# EAGLE board schematic (EAGLE 8.3.1)
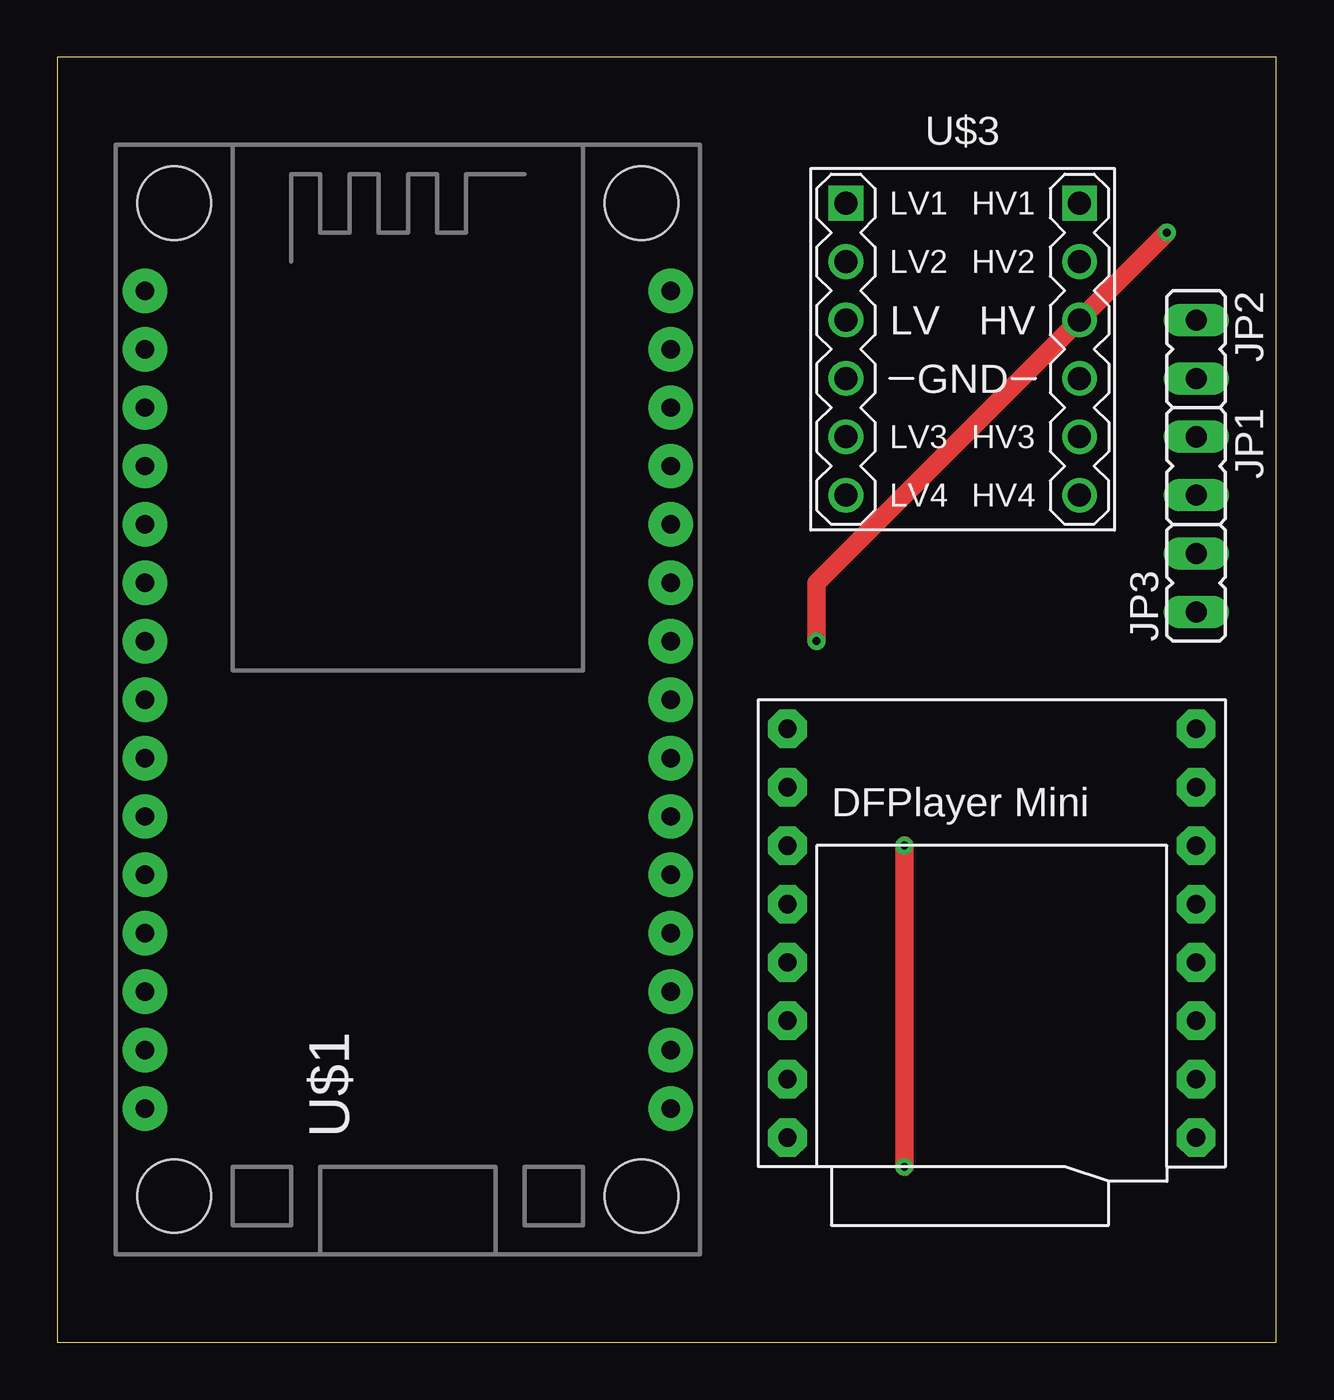
[diagram p0: board, top side]
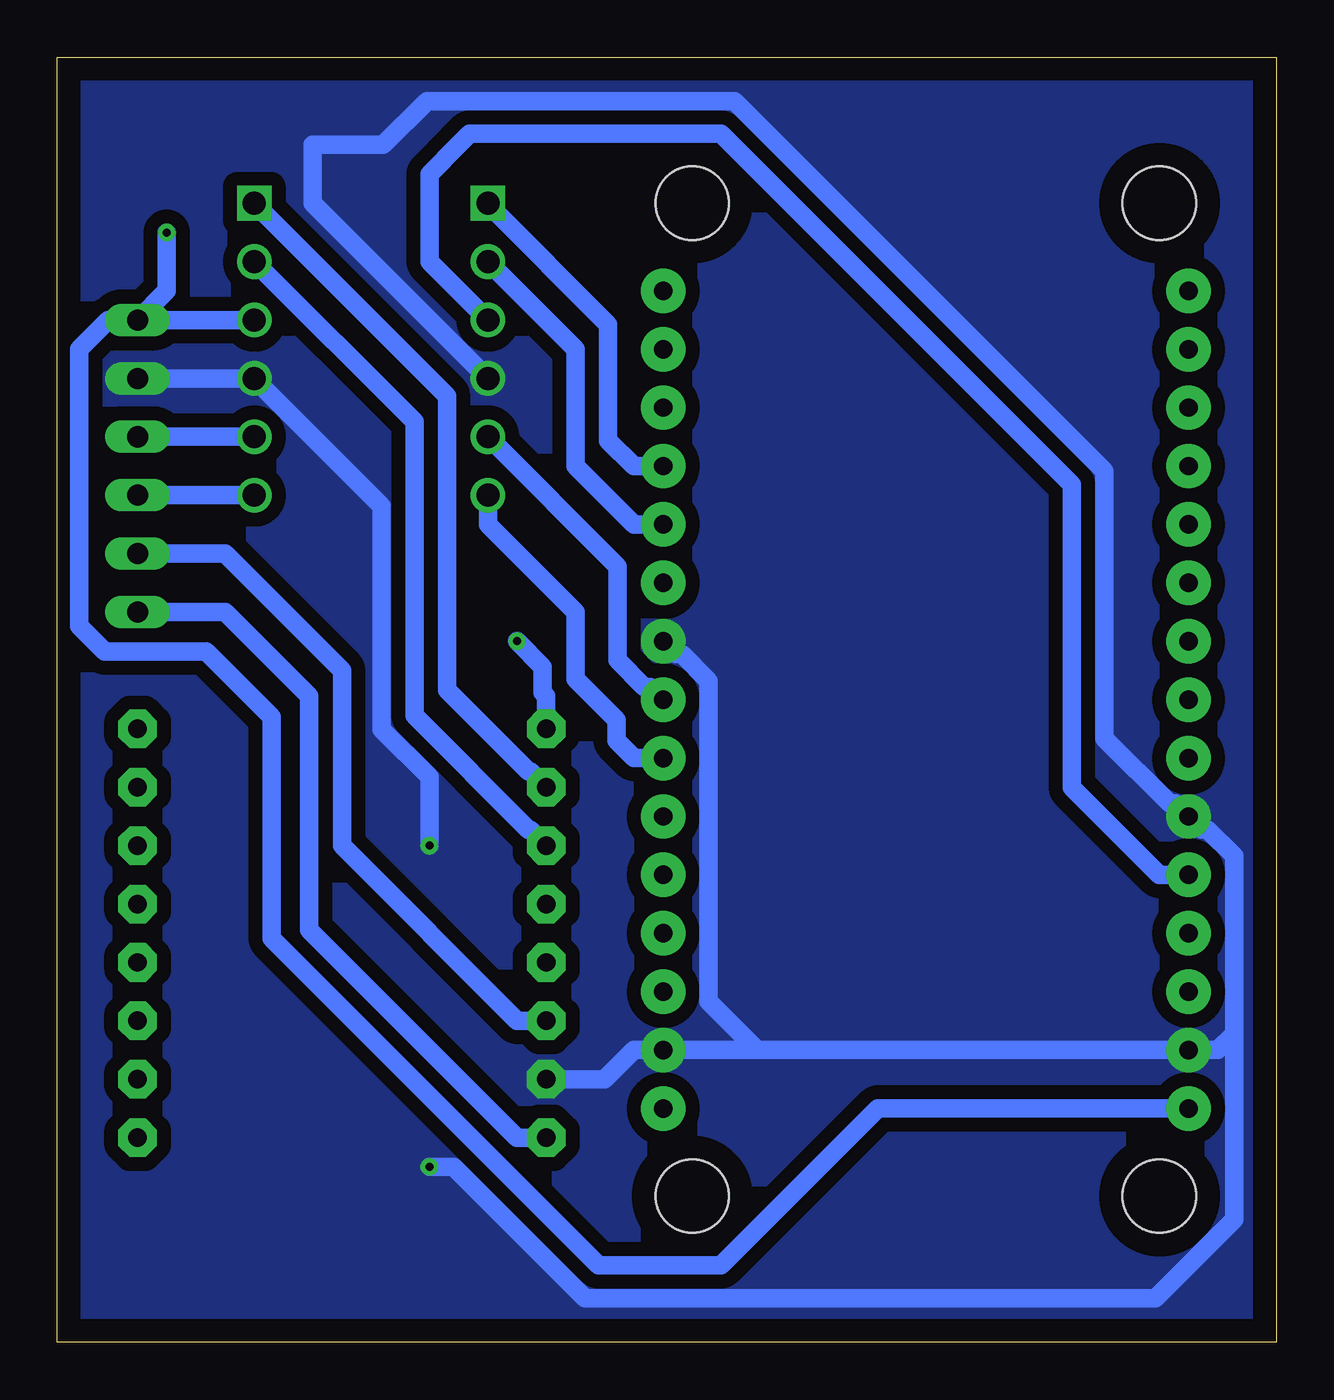
[diagram p1: board, bottom side, seen from below]

Size 53.01 x 55.87 mm. Coordinates in mm from the lower left corner, seen from the top.
Outline: 0,0 53.01,0 53.01,55.87 0,55.87 0,0
Copper layers (1*16): Top 0.035mm / dielectric 1.5mm / Bottom 0.035mm
Design rules "default *": minimum track width 6mil, minimum drill 0.35mm, track to track 24mil, track to pad 24mil, pad to pad 24mil, via to via 24mil, smd to smd 24mil, copper to edge 40mil, drill to drill 24mil, minimum pad ring 10mil, minimum via ring 8mil, stop-mask expansion 4mil, vias tented up to drill 0mil, thermal gap 10mil

## Footprints (pad centres in the part's own frame; a part is rotated, then mirrored left to right if it is on the bottom)
JP1 = drill 0.914 long: 1 0,-1.27; 2 0,1.27
ESP12E_DEVKIT = drill 0.8 pad 1.93: 3V3@0 -11.43,-7.62; 3V3@1 11.43,5.08; 3V3@2 11.43,-17.78; AD0 -11.43,17.78; CLK -11.43,-2.54; CMD -11.43,2.54; D0 11.43,17.78; D1 11.43,15.24; D2 11.43,12.7; D3 11.43,10.16; D4 11.43,7.62; D5 11.43,0; D6 11.43,-2.54; D7 11.43,-5.08; D8 11.43,-7.62; EN -11.43,-10.16; GND@0 -11.43,-5.08; GND@1 -11.43,-15.24; GND@2 11.43,2.54; GND@3 11.43,-15.24; RST -11.43,-12.7; RSV@0 -11.43,15.24; RSV@1 -11.43,12.7; RX 11.43,-10.16; SD0 -11.43,0; SD1 -11.43,5.08; SD2 -11.43,7.62; SD3 -11.43,10.16; TX 11.43,-12.7; VIN -11.43,-17.78 | hole 3.2: -10.16,21.59; 10.16,21.59; 10.16,-21.59; -10.16,-21.59
DFPLAYER = drill 0.8 pad 1.676 octagon: ADKEY1 8.89,-1.27; ADKEY2 8.89,1.27; BUSY 8.89,8.89; DAC_L -8.89,-1.27; DAC_R -8.89,1.27; GND_1 -8.89,-6.35; GND_2 8.89,-6.35; IO1 8.89,-8.89; IO2 8.89,-3.81; RX -8.89,6.35; SPK1 -8.89,-3.81; SPK2 -8.89,-8.89; TX -8.89,3.81; USB+ 8.89,3.81; USB- 8.89,6.35; VCC -8.89,8.89
LEVEL-SHIFTER-4CH = drill 1 square: J1.1 -5.08,6.35; J2.1 5.08,6.35 | drill 1: J1.2 -5.08,3.81; J1.3 -5.08,1.27; J1.4 -5.08,-1.27; J1.5 -5.08,-3.81; J1.6 -5.08,-6.35; J2.2 5.08,3.81; J2.3 5.08,1.27; J2.4 5.08,-1.27; J2.5 5.08,-3.81; J2.6 5.08,-6.35

## Placement (x,y rotation side)
JP1  [JP1]  49.53,38.1 180 top
JP2  [JP1]  49.53,43.18 180 top
JP3  [JP1]  49.53,33.02 0 top
U$1  ESP12E_DEVKIT  [ESP12E_DEVKIT]  15.24,27.94 0 top
U$2  DFPLAYER  [DFPLAYER]  40.64,17.78 0 top
U$3  LEVEL-SHIFTER-4CH  [LEVEL-SHIFTER-4CH]  39.37,43.18 0 top

## Library data of the parts
JP1-JP3 = jumper
U$1 = ESP12E_DEVKIT
U$2 = DFPlayer_v1
U$3 = diy-modules

## Nets
3,3V: U$1.3V3@0 U$3.J1.3
GND: JP2.2 U$1.GND@0 U$1.GND@1 U$1.GND@2 U$1.GND@3 U$2.GND_1 U$3.J1.4 U$3.J2.4
N$1: JP1.1 U$3.J2.5
N$2: JP1.2 U$3.J2.6
N$3: U$1.D3 U$3.J1.1
N$4: U$1.D4 U$3.J1.2
N$5: U$1.D5 U$3.J1.5
N$6: U$1.D6 U$3.J1.6
N$7: U$2.RX U$3.J2.1
N$8: U$2.TX U$3.J2.2
N$9: JP3.2 U$2.SPK1
N$10: JP3.1 U$2.SPK2
VCC: JP2.1 U$1.VIN U$2.VCC U$3.J2.3

## Tracks (layer width: path | path; a pad name or v marks a point on that pad's centre or on a via)
3,3V
  Bottom 0.813: U$1.3V3@0 5.08,20.32 8.89,24.13 8.89,37.29 24.15,52.55 35.08,52.55 | 34.29,52.55 35.08,52.55 | 35.08,52.55 35.56,52.07 36.83,50.8 36.83,46.99 U$3.J1.3
GND  (via drill 0.35)
  Top 0.813: v36.83,21.59 v36.83,7.62
  Bottom 0.813: JP2.2 U$3.J2.4 38.91,36.37 38.91,26.65 36.83,24.58 v36.83,21.59 | U$2.GND_1 29.21,11.43 27.94,12.7 U$1.GND@3 22.58,12.7 | 22.58,12.7 U$1.GND@1 2.54,12.7 1.83,13.41 | 22.58,12.7 24.69,14.81 24.69,28.76 25.85,29.92 26.11,29.92 U$1.GND@2 | 1.83,13.41 1.83,21.14 2.99,22.3 3.25,22.3 U$1.GND@0 4.37,23.42 4.63,23.42 7.47,26.26 7.47,37.88 23.56,53.98 36.94,53.98 38.84,52.07 41.91,52.07 41.91,49.53 U$3.J1.4 | v36.83,7.62 35.77,7.62 30.06,1.9 5.25,1.9 1.83,5.33 1.83,13.41
  pour Bottom (no thermals): 0,55.88 53.34,55.88 53.34,0 0,0
N$1
  Bottom 0.813: U$3.J2.5 JP1.1
N$2
  Bottom 0.813: U$3.J2.6 JP1.2
N$3
  Bottom 0.813: U$3.J1.1 34.29,49.49 29.06,44.26 29.06,39.22 27.94,38.1 U$1.D3
N$4
  Bottom 0.813: U$1.D4 27.94,35.56 30.48,38.1 30.48,43.18 U$3.J1.2
N$5
  Bottom 0.813: U$3.J1.5 28.65,33.73 28.65,29.66 27.49,28.5 27.23,28.5 U$1.D5
N$6
  Bottom 0.813: U$3.J1.6 34.29,35.56 30.48,31.75 30.48,28.83 28.7,27.05 28.7,26.16 27.94,25.4 U$1.D6
N$7
  Bottom 0.813: U$2.RX 32.44,24.82 32.52,24.82 36.06,28.36 36.06,41.14 U$3.J2.1
N$8
  Bottom 0.813: U$3.J2.2 37.48,40.02 37.48,27.24 32.52,22.28 32.44,22.28 U$2.TX
N$9
  Bottom 0.813: JP3.2 45.72,34.29 40.64,29.21 40.64,21.59 33.02,13.97 U$2.SPK1
N$10
  Bottom 0.813: JP3.1 45.72,31.75 42.06,28.09 42.06,17.93 33.02,8.89 U$2.SPK2
VCC  (via drill 0.35)
  Top 0.813: v33.02,30.48 33.02,33.02 v48.26,48.26
  Bottom 0.813: JP2.1 U$3.J2.3 | U$2.VCC 31.75,28.09 31.9,28.24 31.9,29.36 v33.02,30.48 | v48.26,48.26 48.26,45.72 JP2.1 | U$1.VIN 17.32,10.16 24.15,3.33 29.47,3.33 43.69,17.55 43.69,27.18 46.53,30.02 50.96,30.02 52.07,31.14 52.07,43.18 50.8,44.45 JP2.1